# Altium PCB CH565W-R0-1v1.PcbDoc (part 3 of 4)
Units mil, origin at the board's own origin, x right, y up, seen from the top; angles counter-clockwise.
Board outline 3947.04 x 3947.04 mil, 4 copper layers (Top Layer, Layer 1, Layer 2, Bottom Layer), stack 23.756 mil thick; 204 components, 168 nets, 932 pads, 1005 vias.
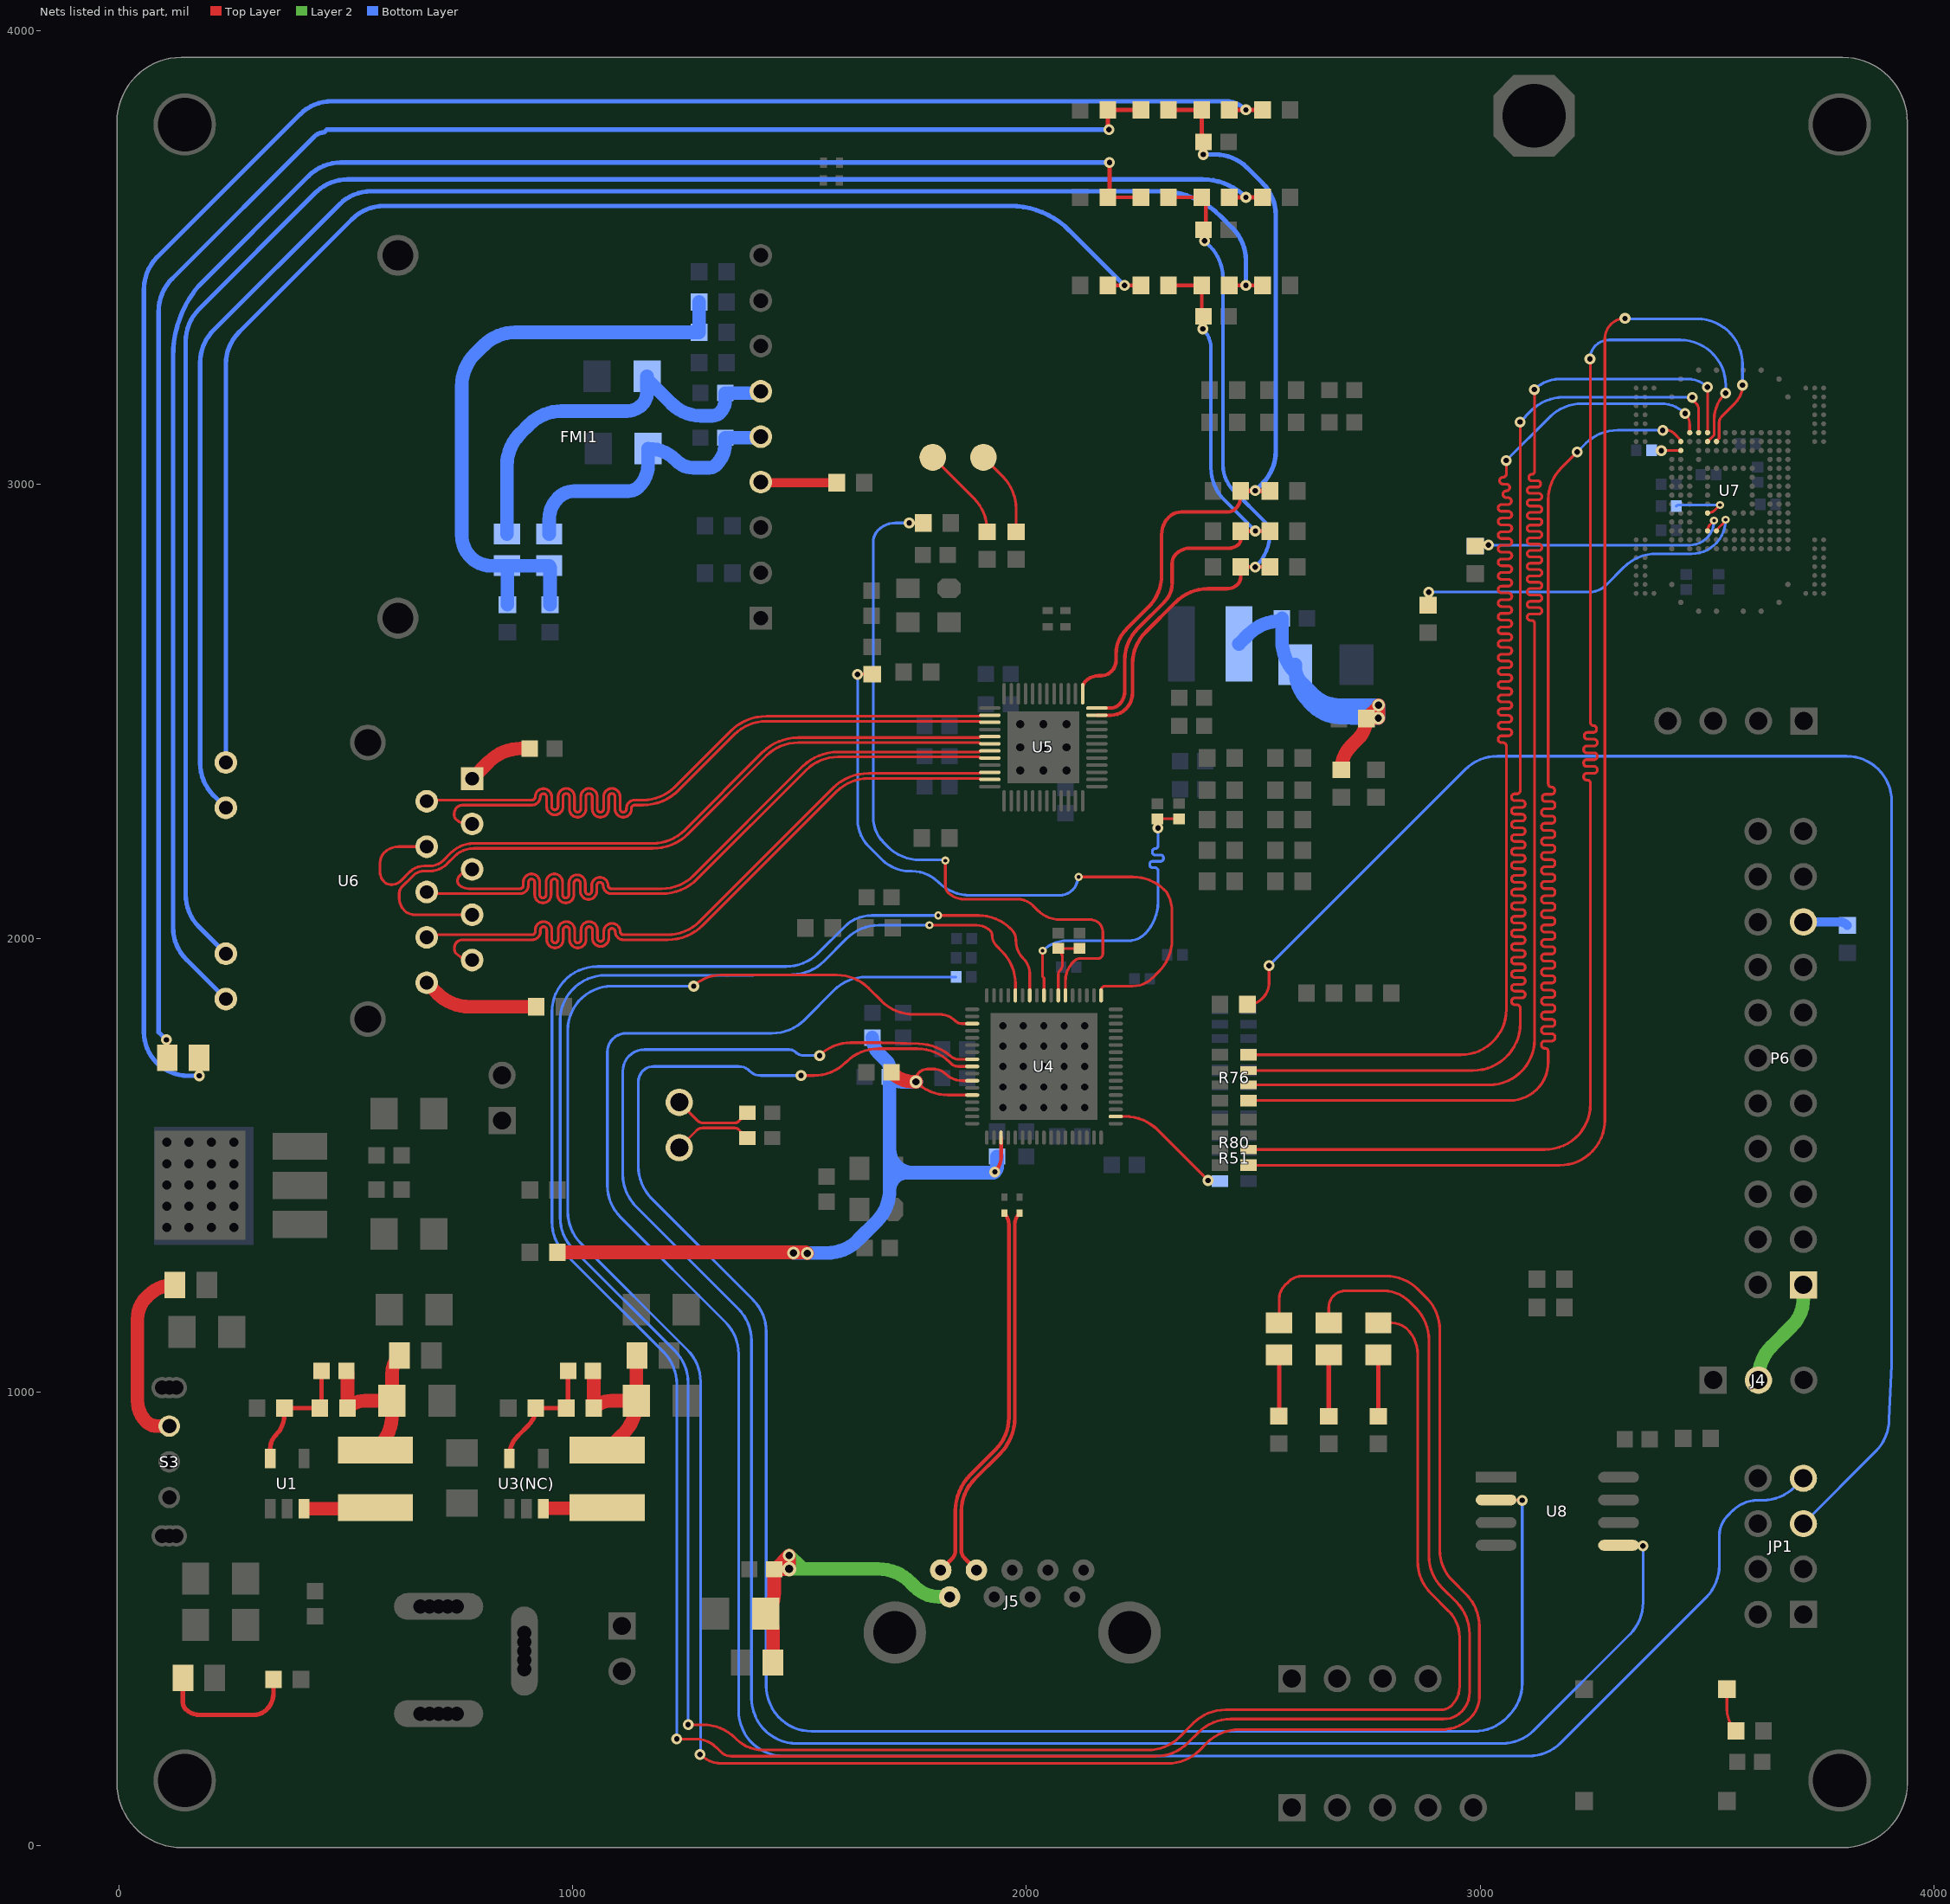
[diagram p5: the nets of this part, all layers, seen from the top]

## Via types
v1: diameter 17.72, hole 7.87, Top Layer to Bottom Layer, tented both sides, 564 vias
v2: diameter 24, hole 12, Top Layer to Bottom Layer, tented both sides, 371 vias
v3: diameter 28, hole 16, Top Layer to Bottom Layer, tented both sides, 64 vias
v4: diameter 26, hole 14, Top Layer to Bottom Layer, tented both sides, 2 vias
v5: diameter 19.68, hole 10, Top Layer to Bottom Layer, tented both sides, 1 vias
v6: diameter 20, hole 10, Top Layer to Bottom Layer, tented both sides, 1 vias
v7: diameter 32, hole 18, Top Layer to Bottom Layer, tented both sides, 1 vias
v8: diameter 17.72, hole 12, Top Layer to Bottom Layer, tented both sides, 1 vias

## Nets (pads, with @x,y where several pads share a name; then routed paths per layer and width w, separated by ;. In a path a pad name is that pad's centre, name@x,y a point inside that pad or via, vN(x,y) a via of type N, cw(c..) or ccw(c..) an arc to the next point about the centre after c; other vN are vias at no path point) (continued)
LED0: D3.2 U4.54 | length 5823.5
  Top Layer w6: v2(1280.4,200.58) ccw(c1328.73,248.91) 1328.73,180.57 2311.21,180.57 ccw(c2311.21,280.57) 2381.92,209.85 2397.98,225.91 cw(c2468.69,155.2) 2468.69,255.2 2915.13,255.2 ccw(c2915.13,346.3) 2979.55,281.88 ccw(c2934.16,327.27) 2998.35,327.27 2998.35,482.96 ccw(c2898.35,482.96) 2969.06,553.67 2939.05,583.68 cw(c3006.69,651.31) 2911.04,651.31 2911.04,1136.81 ccw(c2811.76,1136.81) 2881.96,1207.01 2863.15,1225.82 ccw(c2792.43,1155.11) 2792.43,1255.11 2608.29,1255.11
  Top Layer w6.07: v2(1266.41,1894.11) cw(c1325.85,1834.66) 1325.85,1918.73 1347.45,1918.73 ; 1340.02,1918.46 cw(c1347.45,1818.73) 1347.45,1918.73 ; U4.54@1880.41,1811.61 1856.9,1811.61 cw(c1856.9,1829.57) 1844.2,1816.87 ccw(c1807.52,1780.18) 1807.52,1832.07 1751.28,1832.07 cw(c1751.28,1932.07) 1680.57,1861.35 1652.48,1889.44 ccw(c1581.77,1818.73) 1581.77,1918.73 1347.45,1918.73 ; D3.2@2557.01,1151.68 2557.01,1204.73 cw(c2598.61,1204.73) 2569.2,1234.14 2577.36,1242.3 cw(c2608.29,1211.37) 2608.29,1255.11
  Bottom Layer w6.07: v2(1266.41,1894.11) 1085.7,1894.11 ccw(c1085.7,1797.2) 988.79,1797.2 988.79,1397.57 ccw(c1088.79,1397.57) 1018.08,1326.86 1252.11,1092.83 cw(c1181.4,1022.12) 1281.4,1022.12 v2@1281.4,200.58
LED0/PHYAD0: C53.1 R28.2 R29.1 R58.2 R59.2 U5.35 | length 1544.5
  Top Layer w8: U5.35@2155.35,2491.66 2186.15,2491.66 ccw(c2186.15,2537.98) 2218.9,2505.23 ccw(c2183.24,2540.89) 2233.68,2540.89 2233.68,2604.28 cw(c2333.68,2604.28) 2262.97,2674.99 2328.95,2740.98 cw(c2399.66,2670.27) 2399.66,2770.27 2441.86,2770.27 ccw(c2441.86,2803.97) 2465.69,2780.14 ccw(c2450.2,2795.63) 2472.1,2795.63 R28.2@2472.1,2818.39 v2(2504.35,2818.39) R29.1@2536.59,2818.39 ; R58.2@2313.17,3633.33 R59.2@2386.48,3633.33 cw(c2364.97,3611.82) 2395.39,3611.82 C53.1@2395.39,3562.09 ; C53.1@2390.39,3562.09 2390.39,3542.61 ccw(c2398,3542.61) v2(2392.62,3537.23)
  Bottom Layer w8: v2(2392.62,3537.23) 2403.86,3525.99 cw(c2333.15,3455.28) 2433.15,3455.28 2433.15,3043.33 ccw(c2512.97,3043.33) 2456.53,2986.89 2526.81,2916.6 cw(c2503.17,2892.97) 2536.6,2892.97 2536.6,2892.07 cw(c2436.6,2892.07) 2507.31,2821.36 v2(2504.35,2818.39)
LED1: D4.2 U4.45 | length 5942.9
  Top Layer w6: v2(1229.1,234.45) 1270.53,234.45 cw(c1270.53,168.24) 1317.35,215.06 1326.5,205.9 ccw(c1349.22,228.62) 1349.22,196.49 ; v1(1805.62,2050.05) 1894.54,2050.05 cw(c1894.54,1950.05) 1965.25,2020.76 1966.93,2019.08 cw(c1943.64,1995.78) 1976.58,1995.78 ccw(c2035.26,1995.78) 1986.42,1963.26 ccw(c2035.26,1995.78) 1993.77,1954.29 cw(c1961.59,1922.11) 2007.1,1922.11 U4.45@2007.1,1873.9 ; D4.2@2666.38,1151.68 2666.38,1185.84 cw(c2702.74,1185.84) 2677.03,1211.54 cw(c2703.47,1185.11) 2703.47,1222.49 2722.55,1222.49
  Top Layer w6.07: 1349.22,196.49 2285.24,196.49 ccw(c2285.24,296.49) 2355.95,225.78 2379.26,249.09 cw(c2449.97,178.38) 2449.97,278.38 2919.97,278.38 ccw(c2919.97,333.47) 2958.92,294.52 ccw(c2915.95,337.49) 2976.73,337.49 2976.73,466.1 ccw(c2876.73,466.1) 2947.44,536.81 2916.43,567.82 cw(c2987.14,638.53) 2887.14,638.53 2887.14,1114.26 ccw(c2787.14,1114.26) 2857.85,1184.97 2843.63,1199.19 ccw(c2787.36,1142.92) 2787.36,1222.49 2722.55,1222.49
  Bottom Layer w6: v2(1229.1,234.45) 1229.1,1016.88 ccw(c1129.1,1016.88) 1199.81,1087.59 983.16,1304.24 cw(c1053.87,1374.95) 953.87,1374.95 953.87,1837.59 cw(c1053.87,1837.59) 1053.73,1937.59 cw(c1053.87,1837.59) 1053.87,1937.59 1470.08,1937.59 ccw(c1470.08,2037.59) 1540.79,1966.88 1599.42,2025.5 cw(c1658.68,1966.23) 1658.68,2050.05 v1(1805.62,2050.05)
LED1/CFG_LDO0: C58.1 R37.2 R38.1 R71.2 R72.2 U5.36 | length 1320.4
  Top Layer w8: U5.36@2155.35,2507.41 2185.36,2507.41 ccw(c2185.36,2534.62) 2204.61,2515.38 ccw(c2175.97,2544.02) 2216.47,2544.02 2216.47,2612.35 cw(c2316.47,2612.35) 2245.76,2683.06 2304.03,2741.33 ccw(c2262.41,2782.95) 2321.27,2782.95 2321.27,2826.36 cw(c2350.68,2826.36) 2329.88,2847.16 cw(c2360.56,2816.49) 2360.56,2859.87 2446.75,2859.87 ccw(c2446.75,2890.29) 2468.26,2868.78 ccw(c2458.98,2878.06) 2472.1,2878.06 R37.2@2472.1,2897.13 R38.1@2536.59,2897.13 ; R71.2@2313.17,3439.1 R72.2@2386.48,3439.1 2386.48,3380.36 ccw(c2399.84,3380.36) C58.1@2390.39,3370.91 ccw(c2394.06,3367.25) 2388.87,3367.25 v2(2388.87,3343.33)
  Bottom Layer w8: v2(2388.87,3343.33) cw(c2345.72,3300.18) 2406.75,3300.18 2406.75,3037.06 ccw(c2506.75,3037.06) 2436.04,2966.35 v2(2504.64,2897.75)
LED2: D5.2 U4.47 | length 5531.7
  Top Layer w6: v2(1254.15,266) 1287.31,266 cw(c1287.31,166) 1358.02,236.71 1360.58,234.15 ccw(c1418.62,292.2) 1418.62,210.11 2268.45,210.11 ccw(c2268.45,307.09) 2337.03,238.52 2368.08,269.57 cw(c2438.79,198.86) 2438.79,298.86 2914.27,298.86 ccw(c2914.27,331.39) 2937.27,308.38 ccw(c2895.1,350.55) 2954.74,350.55 2954.74,458.9 ccw(c2873.41,458.9) 2930.92,516.4 2891.67,555.65 cw(c2962.38,626.36) 2862.38,626.36 2862.38,1082.73 ccw(c2784.65,1082.73) 2839.61,1137.7 ccw(c2805.86,1103.95) 2805.86,1151.68 D5.2@2775.75,1151.68 ; v1(1786.1,2028.55) 1890.11,2028.55 cw(c1890.11,1985.28) 1920.71,2015.87 cw(c1912.39,2007.55) 1924.15,2007.55 ccw(c1959.87,2007.55) 1934.61,1982.3 1946.31,1970.6 cw(c1875.6,1899.89) 1975.6,1899.89 U4.47@1975.6,1873.9
  Bottom Layer w6: v2(1254.15,266) 1254.15,1019.48 ccw(c1154.15,1019.48) 1224.86,1090.19 1001.28,1313.77 cw(c1071.99,1384.48) 971.99,1384.48 971.99,1818.23 cw(c1071.99,1818.23) 972.05,1821.42 cw(c1071.99,1818.23) 1071.99,1918.23 1398.39,1918.23 1483.26,1920.24 cw(c1483.42,1914.24) 1483.42,1920.24 ccw(c1483.42,2020.24) 1554.13,1949.53 1604,1999.39 cw(c1674.38,1929) 1674.38,2028.55 v1(1786.1,2028.55)
LED2/CFG_LDO1: C54.1 R39.2 R40.1 R67.2 R68.2 U5.37 | length 1758.8
  Top Layer w8: U5.37@2123.85,2538.9 2123.85,2551.15 cw(c2145.58,2551.15) 2130.21,2566.51 2130.33,2566.63 cw(c2159.06,2537.9) 2159.06,2578.53 2164.09,2578.53 ccw(c2164.09,2611.36) 2187.31,2588.15 ccw(c2162.64,2612.81) 2197.53,2612.81 2197.53,2627.01 cw(c2273.45,2627.01) 2219.76,2680.7 2268.71,2729.65 ccw(c2198,2800.36) 2298,2800.36 2298,2889.84 cw(c2352.17,2889.84) 2313.87,2928.15 cw(c2341.34,2900.68) 2341.34,2939.53 2442.41,2939.53 ccw(c2442.41,2966.39) 2461.41,2947.39 ccw(c2435.58,2973.22) 2472.1,2973.22 R39.2@2472.1,2985.87
  Top Layer w10: R67.2@2313.17,3826.22 R68.2@2386.48,3826.22 2386.48,3776.61 ccw(c2416.91,3776.61) C54.1@2395.39,3755.1 ; v2(2389.9,3727.84) ccw(c2388.72,3729.02) 2390.39,3729.02 C54.1@2390.39,3755.1 ; R39.2@2472.1,2985.87 R40.1@2536.59,2985.87
  Bottom Layer w10: v2(2389.9,3727.84) 2415.82,3727.84 cw(c2415.82,3627.84) 2486.53,3698.55 2520.34,3664.74 cw(c2449.63,3594.03) 2549.63,3594.03 2549.63,3073.45 cw(c2449.63,3073.45) 2520.34,3002.74 v2(2504.19,2986.59) ccw(c2514.19,2986.59) v2@2504.19,2986.51
LED_blue_n: D2.2 R68.1 R69.1 | length 4549.1
  Top Layer w10: D2.2@175.98,1736.01 175.98,1697.89 ccw(c177.69,1697.89) v2(176.48,1696.68) ; R68.1@2447.11,3826.22 v2(2483.77,3826.22) R69.1@2520.42,3826.22
  Bottom Layer w10: v2(176.48,1696.68) 151.66,1696.68 cw(c151.66,1794.39) 82.57,1725.3 cw(c150.27,1793) 54.53,1793 54.53,3300.97 54.53,3430.89 cw(c154.53,3430.89) 55.44,3444.37 cw(c154.53,3430.89) 83.82,3501.61 398.2,3815.99 cw(c468.92,3745.28) 468.92,3845.28 2437.74,3845.28 cw(c2437.74,3780.19) v2(2483.77,3826.22)
LED_blue_p: D2.1 R66.2 R67.1 | length 4051.4
  Top Layer w10: v2(103.69,1775.98) cw(c103.69,1773.77) 105.9,1773.77 D2.1@105.9,1736.01 ; v2(2181.54,3782.57) cw(c2187.14,3788.17) 2179.23,3788.17 R66.2@2179.23,3826.22 R67.1@2252.54,3826.22
  Bottom Layer w10: v2(103.69,1775.98) 87,1792.65 87,3242.91 87,3382.79 cw(c187,3382.79) 87.44,3392.17 cw(c187,3382.79) 116.29,3453.5 430.48,3767.69 cw(c451.38,3746.8) 451.38,3776.35 457.6,3782.57 v2(2181.54,3782.57)
LED_green_n: R72.1 R73.1 U6.12 | length 3681.8
  Top Layer w8: R72.1@2447.11,3439.1 v2(2483.77,3439.1) R73.1@2520.42,3439.1
  Bottom Layer w10: U6.12@234.95,2287.54 207.86,2314.63 cw(c278.57,2385.34) 178.57,2385.34 178.57,3269.55 cw(c278.57,3269.55) 180.33,3288.23 cw(c278.57,3269.55) 207.86,3340.26 485.02,3617.42 cw(c555.73,3546.71) 555.73,3646.71 2295.99,3646.71 cw(c2295.99,3461.18) 2427.18,3592.37 2454.48,3565.07 cw(c2383.77,3494.36) 2483.77,3494.36 v2(2483.77,3439.1)
LED_green_p: R70.2 R71.1 U6.11 | length 3157
  Top Layer w8: R70.2@2179.23,3439.1 v2(2215.88,3439.1) R71.1@2252.54,3439.1
  Bottom Layer w10: U6.11@234.95,2387.54 234.95,3265.49 cw(c334.95,3265.49) 264.24,3336.2 513.1,3585.06 cw(c583.81,3514.35) 583.81,3614.35 1964.21,3614.35 cw(c1964.21,3429.85) 2094.67,3560.31 v2(2215.88,3439.1)
LED_yellow_n: R59.1 R61.1 U6.13 | length 3966.9
  Top Layer w10: R59.1@2447.11,3633.33 v2(2483.77,3633.33) R61.1@2520.42,3633.33
  Bottom Layer w10: U6.13@234.95,1965.89 175.89,2024.94 cw(c246.6,2095.65) 146.6,2095.65 146.6,3315.92 cw(c246.6,3315.92) 175.89,3386.63 432.82,3643.57 cw(c503.53,3572.85) 442.14,3651.79 cw(c503.53,3572.85) 457.66,3661.71 cw(c503.53,3572.85) 503.53,3672.85 2388.35,3672.85 cw(c2388.35,3537.92) v2(2483.77,3633.33)
LED_yellow_p: R57.2 R58.1 U6.14 | length 3897.1
  Top Layer w8: R57.2@2179.23,3633.33 R58.1@2252.54,3633.33
  Top Layer w10: R57.2@2179.23,3633.33 ccw(c2174.48,3638.08) 2181.2,3638.08 2183.11,3640 v2(2183.11,3709.99)
  Bottom Layer w10: U6.14@234.95,1865.88 147.83,1953.01 cw(c218.54,2023.72) 118.54,2023.72 118.54,3282.88 cw(c360.1,3282.84) 173.97,3436.81 417.86,3680.7 cw(c488.57,3609.99) 488.57,3709.99 v2(2183.11,3709.99)
MAC_125M: R62.2 U4.40 | length 1595
  Top Layer w6: v2(1741.47,2915.5) 1741.53,2915.44 R62.2@1772.45,2915.44 ; v1(1821.29,2171.08) 1821.29,2114.81 ccw(c1841.25,2114.81) 1827.13,2100.69 ccw(c1862.6,2136.16) 1862.6,2086 1979.94,2086 cw(c1979.94,2037.54) 2014.21,2071.81 2024.38,2061.64 ccw(c2074.66,2111.92) 2042.88,2048.31 ccw(c2074.66,2111.92) 2074.66,2040.82 2140.85,2040.82 cw(c2140.85,2013.19) 2168.47,2013.19 2168.47,1966.22 cw(c2157.43,1966.22) 2157.43,1955.18 2118.97,1955.18 ccw(c2118.97,1934.69) 2104.48,1949.18 ccw(c2149.48,1904.17) 2091.15,1929.62 ccw(c2149.48,1904.17) 2085.84,1904.17 U4.40@2085.84,1873.9
  Bottom Layer w6: v2(1741.47,2915.5) 1711.59,2915.5 ccw(c1711.59,2860.6) 1672.77,2899.42 ccw(c1698.64,2873.55) 1662.05,2873.55 1662.05,2267.4 ccw(c1742.76,2267.4) 1685.69,2210.32 1694.28,2201.73 ccw(c1764.99,2272.44) 1764.99,2172.44 v1@1821.29,2172.44
MAC_EMCO: R60.2 U4.35 | length 1479.9
  Top Layer w6: v2(1627.69,2581.47) cw(c1629.99,2579.17) 1629.99,2582.42 R60.2@1659.93,2582.42 ; v1(2115,2135) 2234.16,2135 2234.26,2135.1 cw(c2234.26,2035.1) 2304.97,2105.81 2309.07,2101.71 cw(c2234.2,2058.14) 2320.82,2058.14 2320.82,1996.81 cw(c2220.82,1996.81) 2291.53,1926.1 2277.83,1912.39 cw(c2234.11,1956.1) 2234.11,1894.28 2173.47,1894.28 ccw(c2173.47,1885.39) 2164.58,1885.39 U4.35@2164.58,1873.9
  Bottom Layer w6: v2(1627.69,2581.47) 1627.69,2261.65 ccw(c1711.68,2261.65) 1652.29,2202.27 1681.45,2173.11 ccw(c1742.73,2234.39) 1742.73,2147.72 1747.55,2147.72 cw(c1747.55,2065.38) 1805.77,2123.61 ccw(c1876.18,2194.01) 1876.18,2094.44 2072.89,2094.44 ccw(c2072.89,2135.4) 2101.85,2106.44 ccw(c2074.94,2133.35) 2113,2133.35 2114.65,2135 v1(2115,2135)
MCU_3V3: C34.1 C35.2 C37.2 C46.2 R85.2 U4.3 U4.62 U4.64 | length 2087.9
  Top Layer w6.07: U4.64@1880.41,1654.13 1826.85,1654.13 cw(c1826.85,1753.51) v3(1756.58,1683.24) 1756.58,1688.57 cw(c1777.53,1688.57) 1762.71,1703.38 cw(c1782.17,1683.92) 1782.17,1711.44 1796.82,1711.44 cw(c1796.82,1677.35) 1800.23,1711.27 cw(c1796.82,1677.35) 1820.92,1701.46 ccw(c1859.15,1739.69) 1859.15,1685.63 U4.62@1880.41,1685.63
  Top Layer w8: v2(1930.24,1484.81) ccw(c1896.78,1518.27) 1944.11,1518.27 U4.3@1944.11,1560.34
  Top Layer w30: R85.2@965.93,1307.5 v3@1482.53,1307.5 ; v3(1486.31,1305.93) ccw(c1482.53,1302.15) v3@1482.53,1307.5 ; v3(1517,1305.31) ccw(c1511.72,1300.04) 1511.72,1307.5 v3@1482.53,1307.5 ; C37.2@1702.17,1704.14 ccw(c1752.63,1754.6) 1752.63,1683.24 v3(1756.58,1683.24)
  Bottom Layer w30: v3(1486.31,1305.93) 1559.86,1305.93 ccw(c1559.86,1403.24) 1628.67,1334.43 1669.06,1374.83 ccw(c1598.35,1445.54) 1698.35,1445.54 ; C35.2@1660.22,1780.43 ccw(c1708.7,1780.43) 1674.42,1746.15 1691.76,1728.8 cw(c1675.87,1712.9) 1698.35,1712.9 C34.1@1698.35,1694.32 ; 1698.35,1545.55 1698.35,1534.22 ; v3(1756.58,1683.24) 1725.09,1683.24 cw(c1725.09,1721.06) C34.1@1698.35,1694.32 ; C46.2@1935.23,1518.66 1935.23,1496.85 cw(c1918.2,1496.85) v2(1930.24,1484.81) cw(c1925.78,1489.28) 1925.78,1482.96 1749.61,1482.96 ; 1698.35,1445.54 cw(c1735.77,1445.54) 1735.77,1482.96 ; 1698.35,1445.54 1698.35,1482.96 ; 1698.35,1482.96 1698.35,1534.22 ; 1698.35,1482.96 1735.77,1482.96 ; 1698.35,1534.22 ccw(c1749.61,1534.22) 1749.61,1482.96 ; 1698.35,1534.22 C34.1@1698.35,1694.32 ; 1735.77,1482.96 1749.61,1482.96
MDI0_n: U5.3 U6.3 | length 1621.3
  Top Layer w6.07: U6.3@777.86,2251.78 767.69,2251.78 cw(c767.69,2287.75) 742.26,2262.32 cw(c751.53,2271.58) 738.43,2271.58 738.43,2274.19 cw(c758.08,2274.19) 744.18,2288.08 744.46,2288.36 cw(c756.66,2276.17) 756.66,2293.41 881.43,2293.41 909.98,2293.41 ccw(c909.98,2311.52) 928.08,2311.52 cw(c935.12,2311.52) 942.15,2311.52 942.15,2290.06 ccw(c960.25,2290.06) 978.36,2290.06 978.36,2311.98 cw(c985.39,2311.98) 992.43,2311.98 992.43,2284.79 ccw(c1010.53,2284.79) 1028.63,2284.79 1028.63,2311.98 cw(c1035.66,2311.98) 1042.7,2311.98 1042.7,2284.79 ccw(c1060.8,2284.79) 1078.9,2284.79 1078.9,2311.98 cw(c1085.94,2311.98) 1092.97,2311.98 1092.97,2284.79 ccw(c1111.08,2284.79) 1129.18,2284.79 1129.18,2286.38 cw(c1136.21,2286.38) 1136.21,2293.41 1144.78,2293.41 1154.38,2293.41 ccw(c1154.38,2404.3) 1232.79,2325.89 1355.86,2448.96 cw(c1426.57,2378.25) 1426.57,2478.25 1894.96,2478.25 cw(c1894.96,2474.26) 1897.78,2477.08 ccw(c1900.61,2479.91) 1900.61,2475.91 U5.3@1919.13,2475.91
MDI0_p: U5.2 U6.2 | length 1620.2
  Top Layer w6.07: U6.2@677.86,2301.78 cw(c684.38,2295.26) 684.38,2304.48 881.43,2304.48 909.98,2304.48 ccw(c909.98,2311.52) 917.01,2311.52 cw(c935.12,2311.52) 953.22,2311.52 953.22,2290.06 ccw(c960.25,2290.06) 967.29,2290.06 967.29,2311.98 cw(c985.39,2311.98) 1003.49,2311.98 1003.49,2284.79 ccw(c1010.53,2284.79) 1017.56,2284.79 1017.56,2311.98 cw(c1035.66,2311.98) 1053.77,2311.98 1053.77,2284.79 ccw(c1060.8,2284.79) 1067.84,2284.79 1067.84,2311.98 cw(c1085.94,2311.98) 1104.04,2311.98 1104.04,2284.79 ccw(c1111.08,2284.79) 1118.11,2284.79 1118.11,2286.38 cw(c1136.21,2286.38) 1136.21,2304.48 1144.78,2304.48 1154.31,2304.48 ccw(c1154.31,2404.48) 1225.02,2333.77 1296.38,2405.14 1348.06,2456.82 cw(c1426.52,2378.36) 1426.52,2489.32 1894.96,2489.32 ccw(c1894.96,2493.31) 1897.78,2490.49 cw(c1900.61,2487.66) 1900.61,2491.66 U5.2@1919.13,2491.66
MDI1_n: U5.6 U6.7 | length 1621.4
  Top Layer w6.07: U6.7@777.86,2051.78 651.16,2051.78 cw(c651.16,2084.04) 628.34,2061.23 cw(c654.82,2087.71) 617.38,2087.71 617.38,2099.56 cw(c636.41,2099.56) 622.95,2113.02 648.16,2138.22 cw(c671.81,2114.56) 671.81,2148.02 684.6,2148.02 ccw(c684.6,2201.55) 722.45,2163.7 739.03,2180.27 cw(c781.56,2137.74) 781.56,2197.89 1175.92,2197.89 ccw(c1175.92,2308.85) 1254.39,2230.39 1425.71,2401.72 cw(c1496.42,2331.01) 1496.42,2431.01 1894.96,2431.01 cw(c1894.96,2427.01) 1897.78,2429.84 ccw(c1900.61,2432.66) 1900.61,2428.67 U5.6@1919.13,2428.67
MDI1_p: U5.5 U6.4 | length 1620.9
  Top Layer w6.07: U6.4@677.86,2201.78 616.15,2201.78 ccw(c616.15,2156.64) 584.23,2188.56 ccw(c606.41,2166.38) 575.04,2166.38 575.04,2145.12 ccw(c603.81,2145.12) 583.46,2124.77 ccw(c599.89,2141.2) 599.89,2117.97 ccw(c599.89,2147.8) 620.98,2126.7 640.33,2146.05 cw(c671.81,2114.56) 671.81,2159.09 684.52,2159.09 ccw(c684.52,2201.76) 714.69,2171.58 731.23,2188.13 cw(c781.52,2137.84) 781.52,2208.96 1175.88,2208.96 ccw(c1175.88,2308.96) 1246.59,2238.25 1417.92,2409.57 cw(c1496.38,2331.11) 1496.38,2442.07 1894.96,2442.07 ccw(c1894.96,2446.07) 1897.78,2443.24 cw(c1900.61,2440.42) 1900.61,2444.41 U5.5@1919.13,2444.41
MDI2_n: U5.8 U6.6 | length 1620.6
  Top Layer w6.07: U6.6@677.86,2101.78 ccw(c686.89,2110.81) 686.89,2098.04 875.16,2098.04 883.73,2098.04 ccw(c883.73,2116.15) 901.83,2116.15 901.83,2123.52 cw(c908.86,2123.52) 915.9,2123.52 915.9,2095.76 ccw(c934,2095.76) 952.1,2095.76 952.1,2123.52 cw(c959.14,2123.52) 966.17,2123.52 966.17,2095.76 ccw(c984.28,2095.76) 1002.38,2095.76 1002.38,2121.59 cw(c1009.41,2121.59) 1016.45,2121.59 1016.45,2103.58 ccw(c1034.55,2103.58) 1052.65,2103.58 1052.65,2116.15 cw(c1059.69,2116.15) 1066.72,2116.15 ccw(c1084.82,2116.15) 1084.82,2098.04 1179.3,2098.04 1196.21,2098.04 ccw(c1196.21,2207.58) 1273.66,2130.13 1513.76,2370.22 cw(c1584.47,2299.51) 1584.47,2399.51 1894.96,2399.51 cw(c1894.96,2395.52) 1897.78,2398.34 ccw(c1900.61,2401.16) 1900.61,2397.17 U5.8@1919.13,2397.17
MDI2_p: U5.7 U6.5 | length 1620.1
  Top Layer w6.07: 749.65,2136.89 ccw(c759.18,2127.38) 745.72,2127.38 745.72,2125.35 ccw(c755.81,2125.35) 748.67,2118.22 ccw(c770.65,2140.19) 770.65,2109.11 875.16,2109.11 883.73,2109.11 ccw(c883.73,2116.15) 890.76,2116.15 890.76,2123.52 cw(c908.86,2123.52) 926.97,2123.52 926.97,2095.76 ccw(c934,2095.76) 941.04,2095.76 941.04,2123.52 cw(c959.14,2123.52) 977.24,2123.52 977.24,2095.76 ccw(c984.28,2095.76) 991.31,2095.76 991.31,2121.59 cw(c1009.41,2121.59) 1027.51,2121.59 1027.51,2103.58 ccw(c1034.55,2103.58) 1041.58,2103.58 1041.58,2116.15 cw(c1059.69,2116.15) 1077.79,2116.15 ccw(c1084.82,2116.15) 1084.82,2109.11 1179.3,2109.11 1196.03,2109.11 ccw(c1196.03,2208) 1265.96,2138.08 1505.96,2378.08 cw(c1584.42,2299.62) 1584.42,2410.58 1894.96,2410.58 ccw(c1894.96,2414.57) 1897.78,2411.75 cw(c1900.61,2408.92) 1900.61,2412.92 U5.7@1919.13,2412.92 ; 749.66,2136.89 755.14,2142.37 cw(c777.86,2119.64) U6.5@777.86,2151.78 ccw(c777.86,2132.27) U6.5@764.06,2146.07
MDI3_n: U5.11 U6.9 | length 1694.7
  Top Layer w6.07: U6.9@777.86,1951.78 cw(c777.86,2001.84) 742.47,1966.44 cw(c750.52,1974.5) 739.13,1974.5 739.13,1979.19 cw(c756.46,1979.19) 744.21,1991.45 cw(c756.18,1979.47) 756.18,1996.41 860.94,1996.41 861.01,1996.47 ; 891,1996.47 861.01,1996.47 ; 1155.46,1996.47 1111.37,1996.47 ; U5.11@1919.13,2349.93 1900.61,2349.93 cw(c1900.61,2353.92) 1897.78,2351.1 ccw(c1894.96,2348.27) 1894.96,2352.27 1651.77,2352.27 ccw(c1651.77,2252.27) 1581.05,2322.98 1286.96,2028.88 cw(c1208.72,2107.12) 1208.72,1996.47 1176.69,1996.47 1111.37,1996.47 ; 861.01,1996.47 901.71,1996.47 910.28,1996.47 ccw(c910.28,2014.58) 928.38,2014.58 928.38,2018.44 cw(c935.42,2018.44) 942.45,2018.44 942.45,1996.64 ccw(c960.55,1996.64) 978.66,1996.64 978.66,2018.44 cw(c985.69,2018.44) 992.72,2018.44 992.72,1996.64 ccw(c1010.83,1996.64) 1028.93,1996.64 1028.93,2018.44 cw(c1035.96,2018.44) 1043,2018.44 1043,2000.01 ccw(c1061.1,2000.01) 1079.2,2000.01 1079.2,2014.58 cw(c1086.24,2014.58) 1093.27,2014.58 ccw(c1111.37,2014.58) 1111.37,1996.47
MDI3_p: U5.10 U6.8 | length 1664.7
  Top Layer w6.07: U6.8@677.86,2001.78 cw(c691.92,1987.72) 691.92,2007.61 859.75,2007.61 859.81,2007.54 891,2007.54 901.71,2007.54 910.28,2007.54 ccw(c910.28,2014.58) 917.31,2014.58 917.31,2018.44 cw(c935.42,2018.44) 953.52,2018.44 953.52,1996.64 ccw(c960.55,1996.64) 967.59,1996.64 967.59,2018.44 cw(c985.69,2018.44) 1003.79,2018.44 1003.79,1996.64 ccw(c1010.83,1996.64) 1017.86,1996.64 1017.86,2018.44 cw(c1035.96,2018.44) 1054.07,2018.44 1054.07,2000.01 ccw(c1061.1,2000.01) 1068.14,2000.01 1068.14,2014.58 cw(c1086.24,2014.58) 1104.34,2014.58 ccw(c1111.37,2014.58) 1111.37,2007.54 ; 1155.46,2007.54 1111.37,2007.54 ; U5.10@1919.13,2365.67 1900.61,2365.67 ccw(c1900.61,2361.68) 1897.78,2364.5 cw(c1894.96,2367.33) 1894.96,2363.33 1761.62,2363.33 1651.62,2363.33 ccw(c1651.62,2252.63) 1573.33,2330.91 1279.26,2036.83 cw(c1208.54,2107.54) 1208.54,2007.54 1176.69,2007.54 1111.37,2007.54
MISO: JP1.5 R34.2 | length 3405
  Top Layer w6: R34.2@2487.06,1847.87 R34.2@2493.5,1854.3 ; R34.2@2487.06,1853.87 ccw(c2487.06,1901.6) R34.2@2493.5,1854.3 ; v2(2534.8,1939.56) 2534.8,1901.6 cw(c2487.06,1901.6) 2534.49,1896.19 cw(c2487.06,1901.6) R34.2@2493.5,1854.3
  Bottom Layer w6: v2(2534.8,1939.56) 2967.16,2371.92 cw(c3037.87,2301.21) 3037.87,2401.21 3808.13,2401.21 cw(c3808.13,2302.32) 3878.06,2372.25 cw(c3807.35,2301.53) 3907.35,2301.53 3907.35,1063.69 cw(c3796.35,1063.69) 3907.22,1058.42 3901.73,939.99 ccw(c3907.73,939.71) 3901.73,939.71 cw(c3801.73,939.71) 3872.44,869 JP1.5@3712.66,709.23
MISO1: U4.60 U8.2 | length 4472.2
  Top Layer w6.07: v2(1502.96,1697.04) 1531.07,1697.04 ccw(c1531.07,1797.04) 1601.78,1726.33 1602.64,1727.19 cw(c1672.6,1657.23) 1672.6,1756.17 1759.79,1756.17 cw(c1759.79,1656.17) 1830.5,1726.88 1833.54,1723.85 ccw(c1849.77,1740.08) 1849.77,1717.12 U4.60@1880.41,1717.12 ; U8.2@3035.36,761.58 3090.59,761.58 cw(c3090.59,758.38) v2(3092.85,760.64)
  Bottom Layer w6.07: v2(1502.96,1697.04) 1414.32,1697.04 cw(c1414.32,1731.19) 1390.18,1707.04 ccw(c1365.43,1682.29) 1365.43,1717.3 1178.02,1717.3 ccw(c1178.02,1683.67) 1144.39,1683.67 1144.39,1496.98 ccw(c1244.39,1496.98) 1173.68,1426.27 1397.05,1202.91 cw(c1326.34,1132.19) 1426.34,1132.19 1426.34,424.01 1426.34,351.49 ccw(c1526.34,351.49) 1526.34,251.49 2987.41,251.49 ccw(c2987.41,351.49) 3058.12,280.78 3063.56,286.22 ccw(c2992.85,356.93) 3092.85,356.93 v2(3092.85,760.64)
MOSI: JP1.7 R20.2 | length 5115
  Bottom Layer w6: R20.2@1844.8,1914.38 1646.21,1914.38 ccw(c1646.21,1814.38) 1575.5,1885.09 1510.02,1819.61 cw(c1439.31,1890.32) 1439.31,1790.32 1117.38,1790.32 ccw(c1117.38,1749.06) 1076.11,1749.06 1076.11,1455.17 ccw(c1176.11,1455.17) 1105.4,1384.45 1336.04,1153.81 cw(c1265.33,1083.1) 1365.33,1083.1 1365.33,296.91 ccw(c1465.33,296.91) 1465.33,196.91 1531.43,196.91 3107.02,196.91 ccw(c3107.02,296.91) 3177.73,226.2 3498.08,546.55 ccw(c3427.37,617.26) 3527.37,617.26 3527.37,681.95 cw(c3591.26,681.95) 3546.08,727.12 3556.74,737.78 ; 3556.77,737.81 cw(c3612.26,682.26) 3587.5,756.77 cw(c3612.26,682.26) 3612.26,760.77 3622.79,760.77 ccw(c3622.79,860.77) 3693.5,790.06 JP1.7@3712.66,809.23
MOSI1: U4.59 U8.5 | length 4654.2
  Top Layer w6.07: v2(1543.99,1741.25) cw(c1612.26,1672.98) 1612.26,1769.54 1680.69,1769.54 1762.89,1767.2 cw(c1759.79,1656.17) 1827.45,1744.26 1831.26,1741.33 cw(c1827.58,1736.51) 1831.84,1740.83 1831.87,1740.8 ccw(c1851.06,1760.04) 1851.06,1732.87 U4.59@1880.41,1732.87 ; U8.5@3305.36,661.58 ccw(c3308.24,664.46) 3308.24,660.38 v2(3359.33,660.38)
  Bottom Layer w6.07: v2(1543.99,1741.25) 1508.99,1741.25 cw(c1508.99,1766.64) 1491.04,1748.69 ccw(c1477.42,1735.07) 1477.42,1754.33 1157.72,1754.33 ccw(c1157.72,1706.63) 1110.03,1706.63 1110.03,1479.31 ccw(c1210.03,1479.31) 1139.32,1408.6 1364.49,1183.42 cw(c1293.78,1112.71) 1393.78,1112.71 1393.78,324.57 ccw(c1493.78,324.57) 1493.78,224.57 2930.39,224.57 3048.2,224.57 ccw(c3048.2,324.57) 3118.91,253.86 3330.04,464.98 ccw(c3259.33,535.69) 3359.33,535.69 v2(3359.33,660.38)
NetC1_2: C1.2 C4.2 L1.2 L2.1 R1.1 | length 408.6
  Top Layer w30: C4.2@500.73,1045.86 cw(c495.11,1040.24) 503.06,1040.24 R1.1@503.06,964.09 cw(c541.59,925.56) 541.59,980.05 C1.2@601.33,980.05 ; L1.2@564.59,871.4 572.04,878.85 ccw(c501.33,949.57) 601.33,949.57 C1.2@601.33,980.05 ; L2.1@617.88,1079.72 ccw(c657.83,1039.77) 601.33,1039.77 C1.2@601.33,980.05
NetC4_1: C4.1 R1.2 R3.2 U1.5 | length 280.7
  Top Layer w10: U1.5@332.87,852.63 332.87,874.69 cw(c374.77,874.69) 345.14,904.32 ccw(c299.07,950.39) 364.23,950.39 R3.2@364.23,964.09 R1.2@442.43,964.09 ccw(c434.46,972.06) 445.73,972.06 C4.1@445.73,1045.86
NetC12_1: C12.1 R4.2 R5.2 U3(NC).5 | length 280.7
  Top Layer w10: 860,852.63 860,857.86 cw(c923.26,857.86) 878.53,902.59 903.05,927.12 ccw(c866.08,964.09) R5.2@918.37,964.09 R4.2@985.52,964.09 ccw(c976.01,973.61) 989.47,973.61 C12.1@989.47,1045.86
NetC12_2: C12.2 C13.2 L3.2 L4.1 R4.1 | length 411.5
  Top Layer w30: C12.2@1044.47,1045.86 cw(c1040.39,1041.79) 1046.15,1041.79 R4.1@1046.15,964.09 cw(c1084.69,925.56) 1084.69,980.05 C13.2@1139.85,980.05 ; L3.2@1075.44,871.49 L3.2@1075.53,871.4 1110.56,906.43 ccw(c1039.85,977.14) 1139.85,977.14 C13.2@1139.85,980.05 ; L4.1@1141.72,1079.72 ccw(c1146.24,1075.2) 1139.85,1075.2 C13.2@1139.85,980.05
NetC19_1: C19.1 C20.1 FMI1.6 L5.2 | length 900.9
  Bottom Layer w30: L5.2@854.63,2891.15 854.63,3041.59 cw(c954.63,3041.59) 881.55,3109.85 cw(c954.63,3041.59) 883.92,3112.31 904.4,3132.79 cw(c975.11,3062.08) 975.11,3162.08 1118.85,3162.08 ccw(c1118.85,3209.11) 1152.1,3175.85 ccw(c1124.5,3203.45) 1160.76,3189 ccw(c1124.5,3203.45) 1163.53,3203.45 C19.1@1163.53,3232.55 ; C19.1@1163.53,3238.71 C19.1@1163.53,3232.55 ; FMI1.6@1414.36,3205.51 cw(c1405.46,3214.41) 1405.46,3201.83 C20.1@1336.16,3201.83 1336.16,3186.9 cw(c1296.49,3186.9) 1324.54,3158.84 cw(c1307.11,3176.27) 1307.11,3151.62 1282.05,3151.62 cw(c1282.05,3242.38) 1217.88,3178.21 C19.1@1163.53,3232.55
NetC21_1: C21.1 C22.1 FMI1.5 L6.2 | length 666.3
  Bottom Layer w6.07: FMI1.5@1409.13,3103.34 ccw(c1409.13,3110.74) FMI1.5@1414.36,3105.51
  Bottom Layer w30: L6.2@947.63,2891.15 947.63,2922.4 cw(c1016.45,2922.4) 967.79,2971.06 cw(c1002.98,2935.87) 1002.98,2985.64 1122.09,2985.64 ccw(c1122.09,3018.82) 1145.55,2995.36 ccw(c1096.16,3044.74) 1166.01,3044.74 C21.1@1166.01,3079.34 cw(c1166.01,2993.24) 1226.89,3054.12 1228.56,3052.45 ccw(c1265.7,3089.6) 1265.7,3037.07 1300.38,3037.07 ccw(c1300.38,3059.19) 1316.02,3043.54 ccw(c1267.4,3092.16) 1336.16,3092.16 C22.1@1336.16,3103.34 FMI1.5@1409.13,3103.34
NetC26_2: C26.2 R25.1 U4.43 | length 709.1
  Top Layer w6: v1(2035.67,1972.27) 2035.42,1972.02 2035.42,1915.4 2038.59,1912.23 U4.43@2038.59,1873.9 ; v2@2289.99,2239.77 cw(c2293.57,2243.36) 2288.5,2243.36 R25.1@2288.5,2263.11 2336.38,2263.11 C26.2@2336.45,2263.18
  Bottom Layer w6: v1(2035.67,1972.27) cw(c2089.35,1918.59) 2089.35,1994.51 2225.62,1994.51 ccw(c2225.62,2044.12) 2260.7,2009.04 ccw(c2189.99,2079.75) 2289.99,2079.75 2289.99,2146.14 2289.99,2149.14 ccw(c2283.69,2149.14) 2283.69,2155.44 2277.96,2155.44 cw(c2277.96,2161.74) 2271.66,2161.74 2271.66,2163.14 cw(c2277.96,2163.14) 2277.96,2169.44 2295.67,2169.44 ccw(c2295.67,2175.74) 2301.97,2175.74 2301.97,2177.14 ccw(c2295.67,2177.14) 2295.67,2183.44 2283.69,2183.44 cw(c2283.69,2189.74) 2277.39,2189.74 2277.39,2191.14 cw(c2283.69,2191.14) 2283.69,2197.44 ccw(c2283.69,2203.74) 2289.99,2203.74 2289.99,2237.77 v2@2289.99,2239.77
  other v2: 2289.99,2242.77
NetC27_1: C27.1 R26.2 U4.41 | length 154.6
  Top Layer w6: U4.41@2070.09,1873.9 2070.09,1918.54 cw(c2086.14,1918.54) 2074.79,1929.9 ccw(c2063.81,1940.88) 2079.34,1940.88 2079.34,1955.55 ccw(c2048.61,1955.55) R26.2@2070.34,1977.28 2116.28,1977.28 C27.1@2116.58,1977.58
NetC40_1: C40.1 U6.1 | length 150
  Top Layer w30: U6.1@777.86,2351.78 814.93,2388.85 cw(c885.64,2318.14) 885.64,2418.14 C40.1@904.72,2418.14
NetC44_2: C44.2 C45.2 L7.2 R54.1 R56.1 | length 1229.4
  Top Layer w30: R56.1@2694.06,2371.24 cw(c2769.63,2371.24) 2716.19,2424.68 2731.04,2439.53 ccw(c2686.55,2484.02) R54.1@2749.47,2484.02 ; R54.1@2749.47,2484.02 cw(c2752.08,2481.41) 2752.08,2485.11 v3(2775.69,2485.11) ccw(c2774.01,2486.78) 2776.38,2486.78 v3(2776.38,2514.01) cw(c2768.95,2514.01) 2774.21,2508.76 R54.1@2749.47,2484.02
  Bottom Layer w30: L7.2@2468.6,2648.83 2490.06,2670.28 cw(c2560.77,2599.57) 2560.77,2699.57 C45.2@2563.17,2699.57 ; C45.2@2563.17,2705.28 C45.2@2563.17,2699.57 ; C44.2@2592.47,2603.15 C44.2@2592.47,2598.15 ; 2631.3,2538.55 ccw(c2690.55,2597.8) 2690.55,2514.01 v3(2776.38,2514.01) ; C45.2@2563.17,2699.57 2563.17,2656.71 ccw(c2663.17,2656.71) 2592.46,2586 C44.2@2592.68,2585.78 ; C44.2@2592.47,2598.15 ccw(c2642.59,2598.15) C44.2@2594.52,2583.93 ; C44.2@2592.47,2598.15 2592.47,2592.35 ccw(c2692.47,2592.35) C44.2@2592.68,2585.78 ; C44.2@2592.68,2585.78 ccw(c2692.47,2592.35) 2621.75,2521.64 2632.34,2511.06 ccw(c2690.94,2569.66) 2690.94,2486.78 2707.94,2486.78 ; C44.2@2592.68,2585.78 C44.2@2594.52,2583.93 ; C44.2@2594.52,2583.93 ccw(c2642.59,2598.15) 2607.15,2562.71 2655.46,2514.39 ccw(c2726.17,2585.11) 2663.88,2506.88 ccw(c2726.17,2585.11) 2691.93,2491.15 ; 2691.93,2491.15 ccw(c2726.17,2585.11) 2707.94,2486.78 ; 2691.93,2491.15 2721.19,2491.15 ccw(c2721.19,2569.2) v3(2776.38,2514.01) ; 2707.94,2486.78 ccw(c2726.17,2585.11) 2726.17,2485.11 v3(2775.69,2485.11) ccw(c2774.01,2486.78) v3@2776.38,2486.78 ; 2707.94,2486.78 v3@2776.38,2486.78 ; v3@2776.38,2486.78 v3(2776.38,2514.01)
NetC60_1: C60.1 U7.K2 | length 41
  Top Layer w6: v2@3401.6,3074.64 3401.86,3074.9 3442.15,3074.9 U7.K2@3442.41,3075.16
  other v2: 3399.6,3074.64
NetC66_1: C66.1 C70.1 F2.1 J5.1 | length 773.4
  Top Layer w30: F2.1@1441.23,402.99 1441.23,471.63 ccw(c1385.59,471.63) C70.1@1424.93,510.97 ccw(c1378.77,557.14) 1444.06,557.14 C66.1@1444.06,608.6 ; v7(1476.8,609.33) cw(c1475.02,611.11) v7@1475.02,608.6 ; C66.1@1444.06,608.6 ccw(c1444.06,613.51) 1447.53,610.04 v3(1476.57,639.08) 1476.57,612.34 cw(c1471.28,612.34) v7@1475.02,608.6 ; C66.1@1444.06,608.6 v7@1475.02,608.6
  Layer 2 w30: v3(1476.57,639.08) v3@1476.8,638.85 ; J5.1@1830.72,547.91 1806.98,547.91 cw(c1806.98,622.07) 1754.54,569.63 1744.13,580.05 ccw(c1673.42,509.33) 1673.42,609.33 1513.11,609.33 ; v3@1476.8,638.85 v7(1476.8,609.33) 1513.11,609.33 ; v3@1476.8,638.85 1501.52,614.13 ccw(c1513.11,625.72) 1513.11,609.33
NetC71_2: C71.2 J5.8 | length 841.8
  Top Layer w8.22: J5.8@1889.78,606.96 1863.29,633.45 cw(c1879.77,649.93) 1856.46,649.93 1856.46,736.91 cw(c1956.46,736.91) 1885.75,807.62 1941.21,863.07 ccw(c1861.15,943.13) 1974.37,943.13 1974.37,1369.15 cw(c2008.98,1369.15) C71.2@1984.51,1393.63
NetC72_2: C72.2 J5.9 | length 841.3
  Top Layer w8.22: J5.9@1811.04,606.96 1835.63,631.55 ccw(c1817.24,649.93) 1843.24,649.93 1843.24,736.91 cw(c1956.46,736.91) 1876.4,816.97 1931.86,872.42 ccw(c1861.15,943.13) 1961.15,943.13 1961.15,1369.15 ccw(c1926.53,1369.15) C72.2@1951.01,1393.63
NetC73_2: C73.2 J1.1 | length 177
  Top Layer w6.07: J1.1@1234.59,1638.12 1275.38,1597.34 ccw(c1286.59,1608.56) 1286.59,1592.69 1357.24,1592.69 ccw(c1357.24,1604.4) 1365.52,1596.12 C73.2@1384.59,1615.2
NetC74_2: C74.2 J1.2 | length 175.9
  Top Layer w6.07: J1.2@1234.59,1538.12 1272.09,1575.62 cw(c1286.59,1561.11) 1286.59,1581.63 1357.14,1581.63 cw(c1357.14,1569.66) 1365.59,1578.12 C74.2@1384.59,1559.12
NetD1_1: D1.1 R2.1 | length 326.4
  Top Layer w10: D1.1@140.35,369.48 140.35,314.57 ccw(c160.01,314.57) 146.1,300.67 ccw(c177.52,332.08) 177.52,287.65 296.76,287.65 ccw(c296.76,327.64) 325.04,299.37 ccw(c289.05,335.35) 335.44,314.41 ccw(c289.05,335.35) 338.7,324.17 ccw(c289.05,335.35) 339.95,335.35 R2.1@339.95,365.91
NetD3_1: D3.1 R81.1 | length 135.5
  Top Layer w10: R81.1@2556.38,946.26 ccw(c2554.85,947.79) 2557.01,947.79 D3.1@2557.01,1081.6
NetD4_1: D4.1 R82.1 | length 135.5
  Top Layer w10: R82.1@2666.38,946.08 D4.1@2666.38,1081.6
NetD5_1: D5.1 R83.1 | length 137.8
  Top Layer w10: D5.1@2775.75,1081.6 2775.75,964.34 ccw(c2801.94,964.34) R83.1@2783.42,945.83
NetF1_1: F1.1 S3.2 | length 406.5
  Top Layer w30: S3.2@110.18,924.32 83.82,924.32 cw(c83.82,959.41) 59.02,934.6 cw(c104.46,980.04) 40.19,980.04 40.19,1160.52 cw(c107.25,1160.52) 59.83,1207.94 63.92,1212.02 cw(c120.84,1155.1) F1.1@120.84,1235.6
NetFMI1_4: FMI1.4 R19.2 | length 167.8
  Top Layer w20: FMI1.4@1414.36,3005.51 ccw(c1417.4,3008.56) 1417.4,3004.25 R19.2@1581.84,3004.25
NetJ4_2: J4.2 P6.1 | length 243.2
  Layer 2 w30: J4.2@3613.66,1025.68 3613.66,1029.89 cw(c3713.66,1029.89) 3642.95,1100.6 3687.97,1145.62 ccw(c3628.35,1205.24) 3712.66,1205.24 P6.1@3712.66,1235.79
NetL1_1: L1.1 U1.3 | length 157.4
  Top Layer w30: U1.3@410.67,742.39 L1.1@563.13,742.39 ; L1.1@560.13,742.39 ccw(c560.13,748.7) L1.1@564.59,744.24
NetL3_1: L3.1 U3(NC).3 | length 140.2
  Top Layer w30: 939.72,743.31 L3.1@1078.61,743.31 ; L3.1@1074.61,743.31 L3.1@1075.53,744.24
NetL5_1: L5.1 L6.1 R8.2 R11.2 R12.2 R13.2 | length 1387.7
  Bottom Layer w30: R12.2@855.52,2735.3 855.52,2818.92 ccw(c852.48,2818.92) L5.1@854.63,2821.07 ; R13.2@949.8,2735.3 949.8,2815.84 ccw(c942.4,2815.84) L6.1@947.63,2821.07 L5.1@854.63,2821.07 ; R8.2@1278.35,3402.57 R11.2@1278.35,3335.66 873.42,3335.66 ccw(c873.42,3235.66) 802.71,3306.37 784.29,3287.94 ccw(c855,3217.23) 755,3217.23 755,2888.99 ccw(c825.19,2888.99) 775.56,2839.36 ccw(c819.7,2883.51) 819.7,2821.07 L5.1@854.63,2821.07
NetP6_17: P6.17 R88.2 | length 99
  Bottom Layer w20: P6.17@3712.66,2035.79 3791.59,2035.79 cw(c3791.59,2010.27) R88.2@3809.64,2028.31
NetR15_1: R15.1 tp1.1 | length 209.7
  Top Layer w6: tp1.1@1793.44,3060.12 1883.99,2969.58 cw(c1813.28,2898.87) 1913.28,2898.87 R15.1@1913.28,2895.75
NetR16_1: R16.1 tp2.1 | length 189.9
  Top Layer w6: tp2.1@1905.1,3060.12 1947.85,3017.37 cw(c1877.14,2946.66) 1977.14,2946.66 R16.1@1977.14,2895.75
NetR27_2: R27.2 S2.2 | length 97.6
  Top Layer w6: S2.2@3544.26,344.38 3544.26,300.4 ccw(c3612.59,300.4) R27.2@3564.27,252.09
NetR51_1: R51.1 U4.19 | length 485.4
  Top Layer w6: U4.19@2196.78,1606.89 2217.62,1606.89 ; v2@2395.27,1471.5 2289.17,1577.6 ccw(c2218.46,1506.89) 2218.46,1606.89 2217.62,1606.89 ; v2@2399.07,1466.86 2288.33,1577.6 ccw(c2217.62,1506.89) 2217.62,1606.89
  other v2: 2400.13,1465.86
NetR55_1: R55.1 U6.10 | length 259.1
  Top Layer w30: U6.10@677.86,1901.78 701.6,1878.05 ccw(c772.31,1948.76) 772.31,1848.76 R55.1@919.3,1848.76
NetR74_2: R74.2 U7.U5 | length 130.8
  Top Layer w6: U7.U5@3501.47,2937.37 ccw(c3501.47,2960.56) 3517.87,2944.16 v1(3528.76,2955.05)
  Bottom Layer w6: R74.2@3432.34,2952.28 cw(c3439.03,2945.59) 3439.03,2955.05 v1(3528.76,2955.05)
NetR75_2: R75.2 R77.1 U7.W5 | length 552.1
  Top Layer w6: U7.W5@3501.47,2898 cw(c3521.54,2898) 3507.34,2912.19 v1(3515.78,2920.63)
  Bottom Layer w6: v2@3022.2,2866.57 3461.72,2866.57 ccw(c3461.72,2920.63) v1(3515.78,2920.63)
  other v2: 3018.2,2866.57
NetR76_5: R76.5 U7.J2 | length 3175.9
  Top Layer w6: R76.5@2489.51,1642.03 3065.22,1642.03 ccw(c3065.22,1727.02) 3150.21,1727.02 3150.21,1747.09 3150.21,1750.09 ccw(c3143.01,1750.09) 3143.01,1757.29 3142.41,1757.29 cw(c3142.41,1764.49) 3135.21,1764.49 3135.21,1766.09 cw(c3142.41,1766.09) 3142.41,1773.29 3158.01,1773.29 ccw(c3158.01,1780.49) 3165.21,1780.49 3165.21,1782.09 ccw(c3158.01,1782.09) 3158.01,1789.29 3142.41,1789.29 cw(c3142.41,1796.49) 3135.21,1796.49 3135.21,1798.09 cw(c3142.41,1798.09) 3142.41,1805.29 3158.01,1805.29 ccw(c3158.01,1812.49) 3165.21,1812.49 3165.21,1814.09 ccw(c3158.01,1814.09) 3158.01,1821.29 3142.41,1821.29 cw(c3142.41,1828.49) 3135.21,1828.49 3135.21,1830.09 cw(c3142.41,1830.09) 3142.41,1837.29 3158.01,1837.29 ccw(c3158.01,1844.49) 3165.21,1844.49 3165.21,1846.09 ccw(c3158.01,1846.09) 3158.01,1853.29 3142.41,1853.29 cw(c3142.41,1860.49) 3135.21,1860.49 3135.21,1862.09 cw(c3142.41,1862.09) 3142.41,1869.29 3158.01,1869.29 ccw(c3158.01,1876.49) 3165.21,1876.49 3165.21,1878.09 ccw(c3158.01,1878.09) 3158.01,1885.29 3142.41,1885.29 cw(c3142.41,1892.49) 3135.21,1892.49 3135.21,1894.09 cw(c3142.41,1894.09) 3142.41,1901.29 3158.01,1901.29 ccw(c3158.01,1908.49) 3165.21,1908.49 3165.21,1910.09 ccw(c3158.01,1910.09) 3158.01,1917.29 3142.41,1917.29 cw(c3142.41,1924.49) 3135.21,1924.49 3135.21,1926.09 cw(c3142.41,1926.09) 3142.41,1933.29 3158.01,1933.29 ccw(c3158.01,1940.49) 3165.21,1940.49 3165.21,1942.09 ccw(c3158.01,1942.09) 3158.01,1949.29 3142.41,1949.29 cw(c3142.41,1956.49) 3135.21,1956.49 3135.21,1958.09 cw(c3142.41,1958.09) 3142.41,1965.29 3158.01,1965.29 ccw(c3158.01,1972.49) 3165.21,1972.49 3165.21,1974.09 ccw(c3158.01,1974.09) 3158.01,1981.29 3142.41,1981.29 cw(c3142.41,1988.49) 3135.21,1988.49 3135.21,1990.09 cw(c3142.41,1990.09) 3142.41,1997.29 3158.01,1997.29 ccw(c3158.01,2004.49) 3165.21,2004.49 3165.21,2006.09 ccw(c3158.01,2006.09) 3158.01,2013.29 3142.41,2013.29 cw(c3142.41,2020.49) 3135.21,2020.49 3135.21,2022.09 cw(c3142.41,2022.09) 3142.41,2029.29 3158.01,2029.29 ccw(c3158.01,2036.49) 3165.21,2036.49 3165.21,2038.09 ccw(c3158.01,2038.09) 3158.01,2045.29 3142.41,2045.29 cw(c3142.41,2052.49) 3135.21,2052.49 3135.21,2054.09 cw(c3142.41,2054.09) 3142.41,2061.29 3158.01,2061.29 ccw(c3158.01,2068.49) 3165.21,2068.49 3165.21,2070.09 ccw(c3158.01,2070.09) 3158.01,2077.29 3142.41,2077.29 cw(c3142.41,2084.49) 3135.21,2084.49 3135.21,2086.09 cw(c3142.41,2086.09) 3142.41,2093.29 3158.01,2093.29 ccw(c3158.01,2100.49) 3165.21,2100.49 3165.21,2102.09 ccw(c3158.01,2102.09) 3158.01,2109.29 3142.41,2109.29 cw(c3142.41,2116.49) 3135.21,2116.49 3135.21,2118.09 cw(c3142.41,2118.09) 3142.41,2125.29 3158.01,2125.29 ccw(c3158.01,2132.49) 3165.21,2132.49 3165.21,2134.09 ccw(c3158.01,2134.09) 3158.01,2141.29 3142.41,2141.29 cw(c3142.41,2148.49) 3135.21,2148.49 3135.21,2150.09 cw(c3142.41,2150.09) 3142.41,2157.29 3158.01,2157.29 ccw(c3158.01,2164.49) 3165.21,2164.49 3165.21,2166.09 ccw(c3158.01,2166.09) 3158.01,2173.29 3142.41,2173.29 cw(c3142.41,2180.49) 3135.21,2180.49 3135.21,2182.09 cw(c3142.41,2182.09) 3142.41,2189.29 3158.01,2189.29 ccw(c3158.01,2196.49) 3165.21,2196.49 3165.21,2198.09 ccw(c3158.01,2198.09) 3158.01,2205.29 3142.41,2205.29 cw(c3142.41,2212.49) 3135.21,2212.49 3135.21,2214.09 cw(c3142.41,2214.09) 3142.41,2221.29 3158.01,2221.29 ccw(c3158.01,2228.49) 3165.21,2228.49 3165.21,2230.09 ccw(c3158.01,2230.09) 3158.01,2237.29 3142.41,2237.29 cw(c3142.41,2244.49) 3135.21,2244.49 3135.21,2246.09 cw(c3142.41,2246.09) 3142.41,2253.29 3158.01,2253.29 ccw(c3158.01,2260.49) 3165.21,2260.49 3165.21,2262.09 ccw(c3158.01,2262.09) 3158.01,2269.29 3142.41,2269.29 cw(c3142.41,2276.49) 3135.21,2276.49 3135.21,2278.09 cw(c3142.41,2278.09) 3142.41,2285.29 3158.01,2285.29 ccw(c3158.01,2292.49) 3165.21,2292.49 3165.21,2294.09 ccw(c3158.01,2294.09) 3158.01,2301.29 3144.2,2301.29 cw(c3144.2,2308.49) 3137,2308.49 3137,2310.09 cw(c3144.2,2310.09) 3144.2,2317.29 3157.41,2317.29 ccw(c3157.41,2324.49) 3164.61,2324.49 3164.61,2326.09 ccw(c3157.41,2326.09) 3157.41,2333.29 cw(c3157.41,2340.49) 3150.21,2340.49 3150.21,2389.14 3150.21,2966.71 cw(c3250.21,2966.71) 3179.5,3037.42 v2(3214.15,3072.07) ; v2(3402.65,3119.85) 3411.57,3119.85 cw(c3411.57,3098.52) 3426.65,3113.61 U7.J2@3443.12,3097.13
  Bottom Layer w6: v2(3214.15,3072.07) 3232.65,3090.56 cw(c3303.36,3019.85) 3303.36,3119.85 v2(3402.65,3119.85)
NetR76_6: R76.6 U7.H5 | length 3196.5
  Top Layer w6: R76.6@2489.51,1676.68 3020.07,1676.68 ccw(c3020.07,1776.68) 3120.07,1776.68 3120.07,2691.35 3120.07,2694.35 ccw(c3113.77,2694.35) 3113.77,2700.65 3110.37,2700.65 cw(c3110.37,2706.95) 3104.07,2706.95 3104.07,2708.35 cw(c3110.37,2708.35) 3110.37,2714.65 3129.77,2714.65 ccw(c3129.77,2720.95) 3136.07,2720.95 3136.07,2722.35 ccw(c3129.77,2722.35) 3129.77,2728.65 3110.37,2728.65 cw(c3110.37,2734.95) 3104.07,2734.95 3104.07,2736.35 cw(c3110.37,2736.35) 3110.37,2742.65 3129.77,2742.65 ccw(c3129.77,2748.95) 3136.07,2748.95 3136.07,2750.35 ccw(c3129.77,2750.35) 3129.77,2756.65 3110.37,2756.65 cw(c3110.37,2762.95) 3104.07,2762.95 3104.07,2764.35 cw(c3110.37,2764.35) 3110.37,2770.65 3129.77,2770.65 ccw(c3129.77,2776.95) 3136.07,2776.95 3136.07,2778.35 ccw(c3129.77,2778.35) 3129.77,2784.65 3110.37,2784.65 cw(c3110.37,2790.95) 3104.07,2790.95 3104.07,2792.35 cw(c3110.37,2792.35) 3110.37,2798.65 3129.77,2798.65 ccw(c3129.77,2804.95) 3136.07,2804.95 3136.07,2806.35 ccw(c3129.77,2806.35) 3129.77,2812.65 3110.37,2812.65 cw(c3110.37,2818.95) 3104.07,2818.95 3104.07,2820.35 cw(c3110.37,2820.35) 3110.37,2826.65 3129.77,2826.65 ccw(c3129.77,2832.95) 3136.07,2832.95 3136.07,2834.35 ccw(c3129.77,2834.35) 3129.77,2840.65 3110.37,2840.65 cw(c3110.37,2846.95) 3104.07,2846.95 3104.07,2848.35 cw(c3110.37,2848.35) 3110.37,2854.65 3129.77,2854.65 ccw(c3129.77,2860.95) 3136.07,2860.95 3136.07,2862.35 ccw(c3129.77,2862.35) 3129.77,2868.65 3110.37,2868.65 cw(c3110.37,2874.95) 3104.07,2874.95 3104.07,2876.35 cw(c3110.37,2876.35) 3110.37,2882.65 3129.77,2882.65 ccw(c3129.77,2888.95) 3136.07,2888.95 3136.07,2890.35 ccw(c3129.77,2890.35) 3129.77,2896.65 3110.37,2896.65 cw(c3110.37,2902.95) 3104.07,2902.95 3104.07,2904.35 cw(c3110.37,2904.35) 3110.37,2910.65 3129.77,2910.65 ccw(c3129.77,2916.95) 3136.07,2916.95 3136.07,2918.35 ccw(c3129.77,2918.35) 3129.77,2924.65 3110.37,2924.65 cw(c3110.37,2930.95) 3104.07,2930.95 3104.07,2932.35 cw(c3110.37,2932.35) 3110.37,2938.65 3129.77,2938.65 ccw(c3129.77,2944.95) 3136.07,2944.95 3136.07,2946.35 ccw(c3129.77,2946.35) 3129.77,2952.65 3110.37,2952.65 cw(c3110.37,2958.95) 3104.07,2958.95 3104.07,2960.35 cw(c3110.37,2960.35) 3110.37,2966.65 3129.77,2966.65 ccw(c3129.77,2972.95) 3136.07,2972.95 3136.07,2974.35 ccw(c3129.77,2974.35) 3129.77,2980.65 3110.37,2980.65 cw(c3110.37,2986.95) 3104.07,2986.95 3104.07,2988.35 cw(c3110.37,2988.35) 3110.37,2994.65 3127.06,2994.65 ccw(c3127.06,3000.95) 3133.36,3000.95 3133.36,3002.35 ccw(c3127.06,3002.35) 3127.06,3008.65 3113.77,3008.65 cw(c3113.77,3014.95) 3107.47,3014.95 3107.47,3016.35 cw(c3113.77,3016.35) 3113.77,3022.65 ccw(c3113.77,3028.95) 3120.07,3028.95 3120.07,3089.07 3120.07,3209.23 v2(3119.72,3209.58) ; U7.H5@3501.47,3114.53 v2@3501.47,3204.25
  Bottom Layer w6: v2(3119.72,3209.58) cw(c3175.24,3154.05) 3175.24,3232.58 3458.56,3232.58 cw(c3458.56,3172.56) v2(3501,3215)
NetR76_7: R76.7 U7.H4 | length 3218.7
  Top Layer w6: R76.7@2489.51,1708.18 2984.47,1708.18 ccw(c2984.47,1812.31) 3088.61,1812.31 3088.61,1842.77 3088.61,1845.77 ccw(c3081.11,1845.77) 3081.11,1853.27 3076.68,1853.27 cw(c3076.68,1860.77) 3076.68,1868.27 3092.05,1868.27 ccw(c3092.05,1875.77) 3092.05,1883.27 3076.68,1883.27 cw(c3076.68,1890.77) 3076.68,1898.27 3092.05,1898.27 ccw(c3092.05,1905.77) 3092.05,1913.27 3076.68,1913.27 cw(c3076.68,1920.77) 3076.68,1928.27 3092.05,1928.27 ccw(c3092.05,1935.77) 3092.05,1943.27 3076.68,1943.27 cw(c3076.68,1950.77) 3076.68,1958.27 3092.05,1958.27 ccw(c3092.05,1965.77) 3092.05,1973.27 3076.68,1973.27 cw(c3076.68,1980.77) 3076.68,1988.27 3092.05,1988.27 ccw(c3092.05,1995.77) 3092.05,2003.27 3076.68,2003.27 cw(c3076.68,2010.77) 3076.68,2018.27 3092.05,2018.27 ccw(c3092.05,2025.77) 3092.05,2033.27 3076.68,2033.27 cw(c3076.68,2040.77) 3076.68,2048.27 3092.05,2048.27 ccw(c3092.05,2055.77) 3092.05,2063.27 3076.68,2063.27 cw(c3076.68,2070.77) 3076.68,2078.27 3092.05,2078.27 ccw(c3092.05,2085.77) 3092.05,2093.27 3076.68,2093.27 cw(c3076.68,2100.77) 3076.68,2108.27 3092.05,2108.27 ccw(c3092.05,2115.77) 3092.05,2123.27 3076.68,2123.27 cw(c3076.68,2130.77) 3076.68,2138.27 3092.05,2138.27 ccw(c3092.05,2145.77) 3092.05,2153.27 3076.68,2153.27 cw(c3076.68,2160.77) 3076.68,2168.27 3092.05,2168.27 ccw(c3092.05,2175.77) 3092.05,2183.27 3076.68,2183.27 cw(c3076.68,2190.77) 3076.68,2198.27 3092.05,2198.27 ccw(c3092.05,2205.77) 3092.05,2213.27 3076.68,2213.27 cw(c3076.68,2220.77) 3076.68,2228.27 3092.05,2228.27 ccw(c3092.05,2235.77) 3092.05,2243.27 3076.68,2243.27 cw(c3076.68,2250.77) 3076.68,2258.27 3092.05,2258.27 ccw(c3092.05,2265.77) 3092.05,2273.27 3076.68,2273.27 cw(c3076.68,2280.77) 3076.68,2288.27 3092.05,2288.27 ccw(c3092.05,2295.77) 3092.05,2303.27 3076.68,2303.27 cw(c3076.68,2310.77) 3076.68,2318.27 3081.11,2318.27 ccw(c3081.11,2325.77) 3088.61,2325.77 3088.61,2412.44 v2@3088.61,3138.04 ; v2(3467.61,3192.5) 3461.18,3186.07 3461.18,3185.77 cw(c3461.18,3165.16) 3481.78,3165.16 U7.H4@3481.78,3114.53
  Bottom Layer w6: v2(3087.85,3138.04) 3113.01,3163.21 cw(c3183.72,3092.5) 3183.72,3192.5 v2(3467.61,3192.5)
NetR76_8: R76.8 U7.H3 | length 3208.8
  Top Layer w6: R76.8@2489.51,1742.82 2957.83,1742.82 ccw(c2957.83,1842.82) 3057.83,1842.82 3057.83,1902.82 3057.83,2420.6 3057.83,2423.6 ccw(c3050.33,2423.6) 3050.33,2431.1 3047.38,2431.1 cw(c3047.38,2438.6) 3047.38,2446.1 3062.38,2446.1 ccw(c3062.38,2453.6) 3062.38,2461.1 3047.38,2461.1 cw(c3047.38,2468.6) 3047.38,2476.1 3062.38,2476.1 ccw(c3062.38,2483.6) 3062.38,2491.1 3047.38,2491.1 cw(c3047.38,2498.6) 3047.38,2506.1 3062.38,2506.1 ccw(c3062.38,2513.6) 3062.38,2521.1 3047.38,2521.1 cw(c3047.38,2528.6) 3047.38,2536.1 3062.38,2536.1 ccw(c3062.38,2543.6) 3062.38,2551.1 3047.38,2551.1 cw(c3047.38,2558.6) 3047.38,2566.1 3062.38,2566.1 ccw(c3062.38,2573.6) 3062.38,2581.1 3047.38,2581.1 cw(c3047.38,2588.6) 3047.38,2596.1 3062.38,2596.1 ccw(c3062.38,2603.6) 3062.38,2611.1 3047.38,2611.1 cw(c3047.38,2618.6) 3047.38,2626.1 3062.38,2626.1 ccw(c3062.38,2633.6) 3062.38,2641.1 3047.38,2641.1 cw(c3047.38,2648.6) 3047.38,2656.1 3062.38,2656.1 ccw(c3062.38,2663.6) 3062.38,2671.1 3047.38,2671.1 cw(c3047.38,2678.6) 3047.38,2686.1 3062.38,2686.1 ccw(c3062.38,2693.6) 3062.38,2701.1 3047.38,2701.1 cw(c3047.38,2708.6) 3047.38,2716.1 3062.38,2716.1 ccw(c3062.38,2723.6) 3062.38,2731.1 3047.38,2731.1 cw(c3047.38,2738.6) 3047.38,2746.1 3062.38,2746.1 ccw(c3062.38,2753.6) 3062.38,2761.1 3047.38,2761.1 cw(c3047.38,2768.6) 3047.38,2776.1 3062.38,2776.1 ccw(c3062.38,2783.6) 3062.38,2791.1 3047.38,2791.1 cw(c3047.38,2798.6) 3047.38,2806.1 3062.38,2806.1 ccw(c3062.38,2813.6) 3062.38,2821.1 3047.38,2821.1 cw(c3047.38,2828.6) 3047.38,2836.1 3062.38,2836.1 ccw(c3062.38,2843.6) 3062.38,2851.1 3047.38,2851.1 cw(c3047.38,2858.6) 3047.38,2866.1 3062.38,2866.1 ccw(c3062.38,2873.6) 3062.38,2881.1 3047.38,2881.1 cw(c3047.38,2888.6) 3047.38,2896.1 3062.38,2896.1 ccw(c3062.38,2903.6) 3062.38,2911.1 3047.38,2911.1 cw(c3047.38,2918.6) 3047.38,2926.1 3062.38,2926.1 ccw(c3062.38,2933.6) 3062.38,2941.1 3047.38,2941.1 cw(c3047.38,2948.6) 3047.38,2956.1 3061.44,2956.1 ccw(c3061.44,2963.6) 3061.44,2971.1 3057.82,2971.1 cw(c3057.82,2978.6) 3057.82,2986.1 ccw(c3057.83,2993.6) 3057.83,3001.1 3050.32,3001.1 cw(c3050.32,3008.6) 3050.32,3016.1 ccw(c3050.33,3023.6) 3057.83,3023.6 3057.83,3052.47 v2(3057.81,3053.18) ; v2(3451.93,3156.62) cw(c3427.4,3132.09) 3462.1,3132.09 U7.H3@3462.1,3114.53
  Bottom Layer w6: v2(3057.81,3053.18) 3153.93,3149.29 cw(c3224.64,3078.58) 3224.64,3178.58 3398.9,3178.58 cw(c3398.9,3103.59) v2(3451.93,3156.62)
NetR78_1: R78.1 U7.W6 | length 758.1
  Top Layer w6: U7.W6@3521.15,2898 cw(c3526.16,2898) 3522.61,2901.53 3539.73,2918.65 ccw(c3535.79,2922.59) v1(3541.36,2922.59)
  Bottom Layer w6: v2(2887.02,2763.02) 3240.58,2763.02 ccw(c3240.58,2815.24) 3277.51,2778.31 3317.41,2818.21 cw(c3388.12,2747.5) 3388.12,2847.5 3466.27,2847.5 ccw(c3466.27,2922.59) v1(3541.36,2922.59)
NetR80_5: R80.5 U7.J6 | length 3143
  Top Layer w6: R80.5@2489.51,1499.31 3175.21,1499.31 ccw(c3175.21,1599.31) 3275.21,1599.31 3275.21,3322.07 cw(c3319.52,3322.07) v2(3319.52,3366.38) ; U7.J6@3521.15,3094.85 3521.15,3096.42 3526.93,3102.2 3526.93,3136.68 cw(c3546.18,3136.68) 3532.57,3150.29 3562.31,3180.04 ccw(c3523.09,3219.26) v2(3578.56,3219.26)
  Bottom Layer w6: v2(3319.52,3366.38) ccw(c3320.45,3366.38) 3320.45,3365.45 3478.56,3365.45 cw(c3478.56,3265.45) 3578.56,3265.45 v2(3578.56,3219.26)
NetR80_6: R80.6 U7.J5 | length 3153.7
  Top Layer w6: R80.6@2489.51,1533.95 3143.25,1533.95 ccw(c3143.25,1633.95) 3243.25,1633.95 3243.25,2338.86 3243.25,2341.86 ccw(c3236.5,2341.86) 3236.5,2348.61 3235,2348.61 cw(c3235,2355.36) 3228.25,2355.36 3228.25,2356.86 cw(c3235,2356.86) 3235,2363.61 3251.5,2363.61 ccw(c3251.5,2370.36) 3258.25,2370.36 3258.25,2371.86 ccw(c3251.5,2371.86) 3251.5,2378.61 3235,2378.61 cw(c3235,2385.36) 3228.25,2385.36 3228.25,2386.86 cw(c3235,2386.86) 3235,2393.61 3251.5,2393.61 ccw(c3251.5,2400.36) 3258.25,2400.36 3258.25,2401.86 ccw(c3251.5,2401.86) 3251.5,2408.61 3235,2408.61 cw(c3235,2415.36) 3228.25,2415.36 3228.25,2416.86 cw(c3235,2416.86) 3235,2423.61 3251.5,2423.61 ccw(c3251.5,2430.36) 3258.25,2430.36 3258.25,2431.86 ccw(c3251.5,2431.86) 3251.5,2438.61 3236.56,2438.61 cw(c3236.56,2445.36) 3229.81,2445.36 3229.81,2446.86 cw(c3236.56,2446.86) 3236.56,2453.61 3250,2453.61 ccw(c3250,2460.36) 3256.75,2460.36 3256.75,2461.86 ccw(c3250,2461.86) 3250,2468.61 cw(c3250,2475.36) 3243.25,2475.36 3243.25,2543.86 3243.25,3275.62 ccw(c3242.12,3275.62) v2(3242.12,3276.76) ; U7.J5@3501.47,3094.85 3515.93,3109.33 3515.93,3143.38 cw(c3594.92,3143.38) 3539.07,3199.23 v2(3541.48,3201.64)
  Bottom Layer w6: v2(3242.12,3276.76) cw(c3284.22,3276.76) 3284.22,3318.85 3441.48,3318.85 cw(c3441.48,3218.85) 3541.48,3218.85 v2(3541.48,3201.64)